# Altium PCB PCB1.PcbDoc
Units mm, origin at the board's own origin, x right, y up, seen from the top; angles counter-clockwise.
Board outline 64.18 x 56.7 mm, 2 copper layers (Top Layer, Bottom Layer); 29 components, 60 nets, 171 pads, 68 vias.
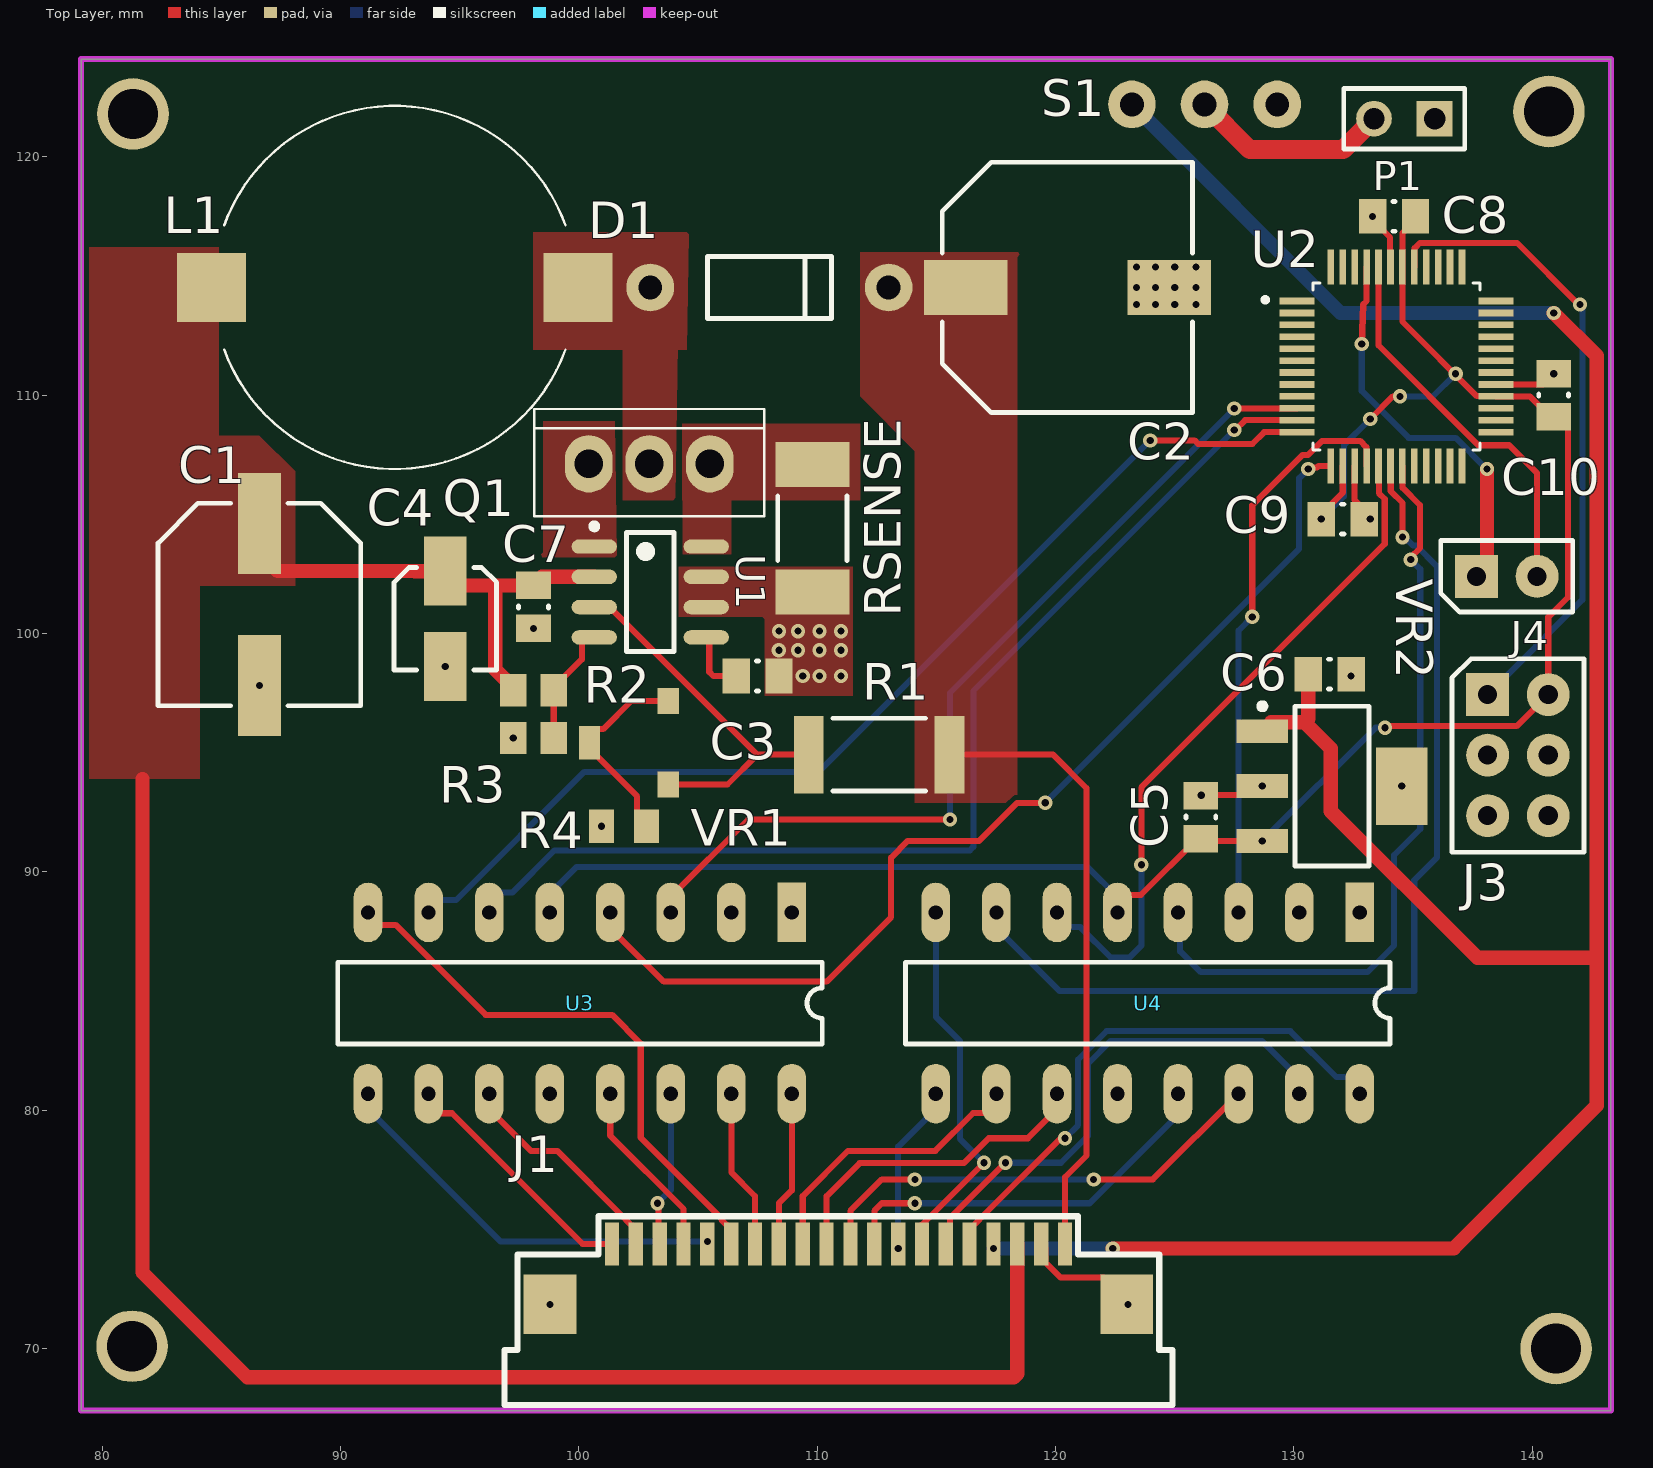
[diagram p0: Top Layer view]
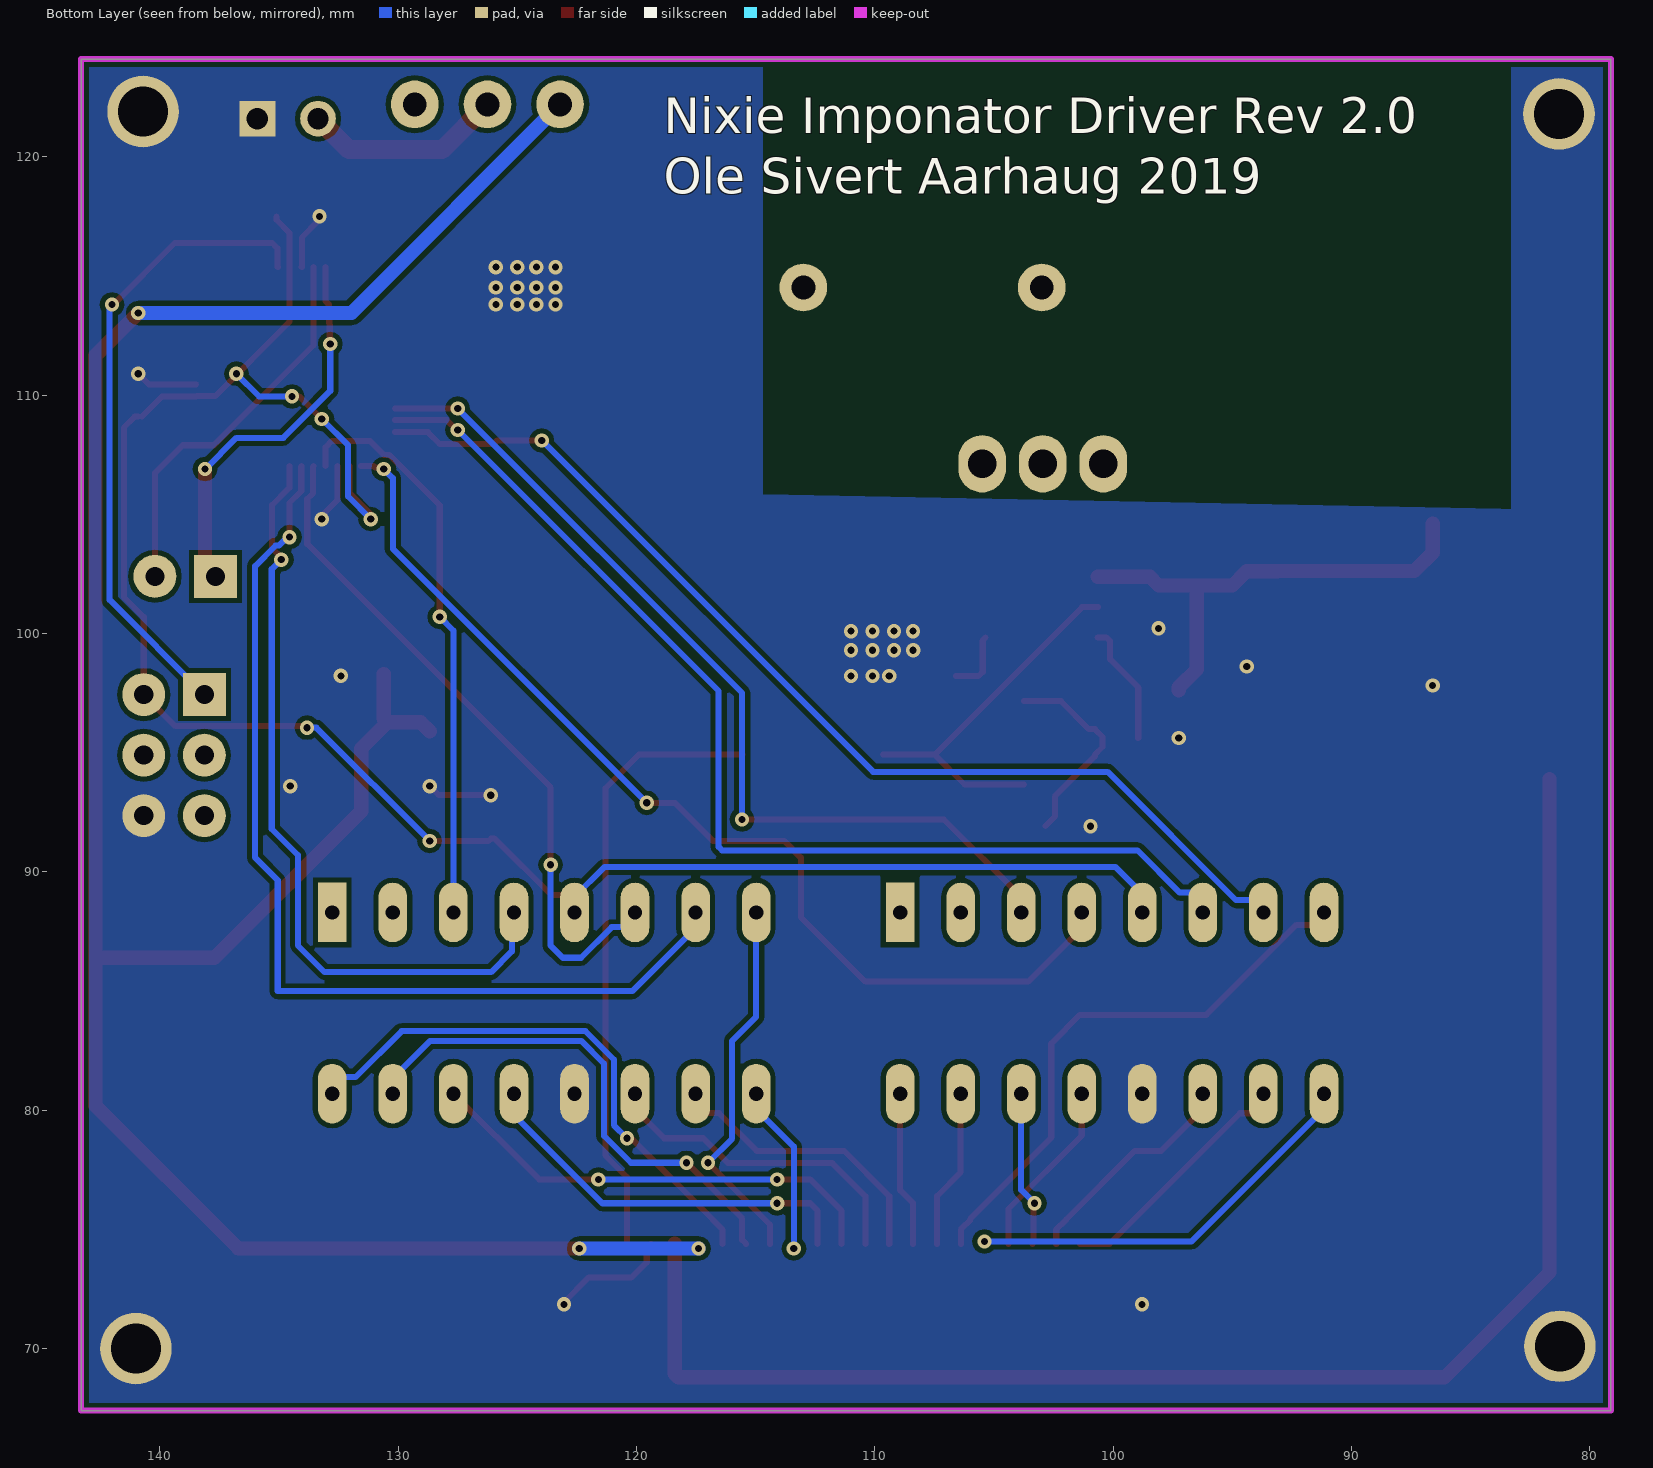
[diagram p1: Bottom Layer view, seen from below]

## Layer stack, top to bottom
Top Solder: solder mask 0.0102, Solder Resist, Dk 3.5
Top Layer: signal copper 0.0356
Dielectric 1: dielectric 0.32, FR-4, Dk 4.8
Bottom Layer: signal copper 0.0356
Bottom Solder: solder mask 0.0102, Solder Resist, Dk 3.5

## Board outline
79.121,67.4 79.121,124.1 143.3,124.1 143.3,67.4

## Design rules (kind name [scope] priority, off if disabled: settings)
BoardOutlineClearance [All] p1: gap=0.2 ignorepadtopadclearanceinfootprint=FALSE except(0.4: Arc-SplitBarrior Arc-SplitContinuation Track-SplitBarrior Track-SplitContinuation SMDPad-SplitBarrior SMDPad-SplitContinuation THPad-SplitBarrior THPad-SplitContinuation Via-SplitBarrior Via-SplitContinuation Fill-SplitBarrior Fill-SplitContinuation Poly-SplitBarrior Poly-SplitContinuation Region-SplitBarrior Region-SplitContinuation Text-SplitBarrior Text-SplitContinuation)
Clearance "Clearance Bottom Layer" [OnLayer('Bottom Layer')] p1: gap=0.203 ignorepadtopadclearanceinfootprint=TRUE except(0.254: Arc-Text Track-Text SMDPad-Text THPad-Text Via-Text Fill-Text Poly-Text Region-Text Text-Text)
Clearance "Clearance Top Layer" [OnLayer('Top Layer')] p2: gap=0.203 ignorepadtopadclearanceinfootprint=TRUE except(0.254: Arc-Text Track-Text SMDPad-Text THPad-Text Via-Text Fill-Text Poly-Text Region-Text Text-Text)
Clearance [All] p3: gap=0.2 ignorepadtopadclearanceinfootprint=FALSE except(0.089: Arc-Arc Arc-Track Arc-SMDPad Track-Track Track-SMDPad SMDPad-SMDPad; 0.127: Arc-Via Track-Via SMDPad-Via THPad-Via Via-Via; 0.254: Arc-Text Track-Text SMDPad-Text THPad-Text Via-Text Fill-Text Poly-Text Region-Text Text-Text)
HoleSize [All] p1: absolutevalues=TRUE maxlimit=6.3 minlimit=0.2 maxpercent=80.000 minpercent=20.000
MinimumAnnularRing [All] p1: minimumring=0.076
MinimumSolderMaskSliver [All] p1: minsoldermaskwidth=0.1
PlaneConnect [All] p1: planeconnectstyle=Direct reliefexpansion=0.508 reliefentries=4 reliefconductorwidth=0.254 reliefairgap=0.254
PolygonConnect PolygonConnect_1 [All] p1: connectstyle=Direct reliefconductorwidth=0.508 reliefentries=4 polygonreliefangle="90 Angle" airgapwidth=0.254
RoutingCorners [All] p1: cornerstyle=Round minsetback=2.54 maxsetback=2.54
RoutingVias [All] p1: holewidth=0.5 width=1 viastyle="Through Hole" minholewidth=0.2 minwidth=0.45 maxholewidth=1 maxwidth=2
SilkToSilkClearance [All] p1: silktosilkclearance=0.1
SilkToSolderMaskClearance [IsPad] p1: minsilkscreentomaskgap=0.1 clearancetoexposedcopper=TRUE
SolderMaskExpansion [All] p1: expansion=0.102
Width [All] p1: maxlimit=2.54 minlimit=0.089 preferedwidth=0.381
24 further rules are at their usual default settings.

## Classes and differential pairs
component class Controller: C8 C9 C10 U2
component class NixieDriver: "Binary Rotary Switch" C1 C2 C3 C4 C5 C6 C7 D1 J1 J3 J4 L1 P1 Q1 R1 R2 R3 R4 RSENSE S1 U1 U3 U4 VR1 VR2
net class HV: NetJ2_1 NixieVCC

## Components (designator, comment, footprint, x,y, rotation, side; value= is the part's Value field where it differs from the comment)
C1 "100 µF, 25 V" CAPAE9583X65M 86.6,101.219 r270 top
C2 "10 µF, 250 V" CAPAE112103X170M 120.5,114.519 r0 top
C3 "100nF" CAPC0805(2012)100_N 107.5,98.219 r180 top
C4 "10µF 16 V" CAPAE5542X55M 94.4,100.619 r270 top
C5 "1uF" CAPC0805(2012)100_N 126.1,92.3 r270 top
C6 "1uF" CAPC0805(2012)100_N 131.5,98.3 r180 top
C7 "100nF" CAPC0805(2012)100_N 98.1,101.119 r270 top
C8 "1uf" CAPC0805(2012)100_N 134.2,117.5 r0 top
C9 "1uf" CAPC0805(2012)100_N 132.05,104.8 r180 top
C10 "1uf" CAPC0805(2012)100_N 140.9,110 r270 top
D1 "BAV21" DO-41 108,114.519 r0 top
J1 "ZF1-20-01-XX-WT" ZF1-20-01-XX-WT 110.394,74.4 r0 top
J3 "UPDI" HDRV6W64P254_2X3_762X508X900B 139.4,94.9 r0 top
J4 "UartDebug" HDRV2W64P254_1X2_508X254X900B 140.2,102.4 r90 top
L1 "100 µH, 1.8 A" B82479A1 84.6,114.519 r0 top
P1 "9V Battery" HDR1X2 135.9,121.6 r180 top
Q1 "IRF644" TO-220-3P 102.96,107.119 r180 top
R1 "1.5M" RC2512 112.6,94.919 r0 top
R2 "10K" R0805 98.1,97.619 r180 top
R3 "10K" R0805 98.1,95.619 r0 top
R4 "10k" RESC0805(2012)_N 101.9,91.919 r0 top
RSENSE "0.05 ohm" LR2010 109.8,104.419 r90 top
S1 "Switch SPDT" 3TH 126.252,122.2 r180 top
U1 "MAX1771ESA" S8-5_L 103,101.744 r0 top
U2 "ATMEGA4809-AFR" *QFP50P900X900X120-48N 134.3,111.2 r0 top
U3 "K155IV1" CircuitWorks-DIP16 108.94,88.3 r270 top
U4 "K155IV1" CircuitWorks-DIP16 132.76,88.3 r270 top
VR1 "5k" "PVG3A trimpot" 102.1,95.419 r90 top
VR2 "MCP1703A" SOT230P700X180-4N 131.6,93.6 r0 top

## Footprints (in the part's own frame and the unit in brackets; to place one, negate y for a bottom-side part, rotate by r counter-clockwise, add the part's x,y. Pads: shape width x height; smd on the part's side, far side on the other; paste and mask are expansions set on the pad)
3TH [mm]
  round 2 hole 1: 1(-3.048,0) 2(0,0) 3(3.048,0)
*QFP50P900X900X120-48N [mm]
  rect 1.47x0.28 smd: 1(-4.17,2.75) 2(-4.17,2.25) 3(-4.17,1.75) 4(-4.17,1.25) 5(-4.17,0.75) 6(-4.17,0.25) 7(-4.17,-0.25) 8(-4.17,-0.75) 9(-4.17,-1.25) 10(-4.17,-1.75) 11(-4.17,-2.25) 12(-4.17,-2.75) 25(4.17,-2.75) 26(4.17,-2.25) 27(4.17,-1.75) 28(4.17,-1.25) 29(4.17,-0.75) 30(4.17,-0.25) 31(4.17,0.25) 32(4.17,0.75) 33(4.17,1.25) 34(4.17,1.75) 35(4.17,2.25) 36(4.17,2.75)
  rect 0.28x1.47 smd: 13(-2.75,-4.17) 14(-2.25,-4.17) 15(-1.75,-4.17) 16(-1.25,-4.17) 17(-0.75,-4.17) 18(-0.25,-4.17) 19(0.25,-4.17) 20(0.75,-4.17) 21(1.25,-4.17) 22(1.75,-4.17) 23(2.25,-4.17) 24(2.75,-4.17) 37(2.75,4.17) 38(2.25,4.17) 39(1.75,4.17) 40(1.25,4.17) 41(0.75,4.17) 42(0.25,4.17) 43(-0.25,4.17) 44(-0.75,4.17) 45(-1.25,4.17) 46(-1.75,4.17) 47(-2.25,4.17) 48(-2.75,4.17)
  silkscreen extent -5.6,-3.5 3.5,3.5
B82479A1 [mm] "Inductor"
  rect 2.9x2.9 smd: 1(0,0) 2(15.37,0)
  silkscreen extent 0.52,-7.62 14.84,7.62
CAPAE5542X55M [mm] "Aluminum Electrolytic Capacitor, Body 4,20x4,20x5,50mm, IPC Low Density"
  rect 2.9x1.8 smd: 1(-2,0) 2(2,0)
  silkscreen extent -2.15,-2.15 2.15,2.15, body extent -2.75,-2.15 2.75,2.15, height 5.5
CAPAE9583X65M [mm] "Aluminum Electrolytic Capacitor, Body 8,30x8,30x6,50mm, IPC Low Density"
  rect 4.25x1.8 smd: 1(-3.4,0) 2(3.4,0)
  silkscreen extent -4.25,-4.25 4.25,4.25, body extent -4.75,-4.25 4.75,4.25, height 6.5
CAPAE112103X170M [mm] "Aluminum Electrolytic Capacitor, Body 10,30x10,30x17,00mm, IPC Low Density"
  rect 3.5x2.3 smd: 1(-4.275,0) 2(4.275,0)
  silkscreen extent -5.25,-5.25 5.25,5.25, body extent -5.63,-5.25 5.62,5.25, height 17
CAPC0805(2012)100_N [mm] "Chip Capacitor, Body 2.0x1.2mm, Height 1.0mm, IPC Medium Density"
  rect 1.15x1.45 smd: 1(-0.9,0) 2(0.9,0)
  silkscreen extent -0.05,-0.63 0.05,0.63, body extent -1.1,-0.72 1.1,0.73, height 1
CircuitWorks-DIP16 [mm]
  rect 2.5x1.2 hole 0.6: 1(0,0)
  oval 2.5x1.2 hole 0.6: 2(0,-2.54) 3(0,-5.08) 4(0,-7.62) 5(0,-10.16) 6(0,-12.7) 7(0,-15.24) 8(0,-17.78) 9(7.6,-17.78) 10(7.6,-15.24) 11(7.6,-12.7) 12(7.6,-10.16) 13(7.6,-7.62) 14(7.6,-5.08) 15(7.6,-2.54) 16(7.6,0)
  silkscreen extent 2.08,-19.05 5.51,1.27, body extent -0.13,-19.68 7.75,1.91, height 4.19
DO-41 [mm]
  round 2 hole 1: 1(-5,0) 2(5,0)
  silkscreen extent -2.6,-1.3 2.6,1.3, body extent -5.51,-1.36 5.51,1.36, height 3.22
HDR1X2 [mm] "Connector; Header; 2 Position"
  rect 1.5x1.5 hole 0.9: 1(0,0)
  round 1.5 hole 0.9: 2(2.54,0)
  silkscreen extent -1.27,-1.27 3.81,1.27
HDRV2W64P254_1X2_508X254X900B [mm] "Header 1x2"
  rect 1.8x1.8 hole 0.8: 1(0,2.54)
  round 1.8 hole 0.8: 2(0,0)
  silkscreen extent -1.5,-1.5 1.5,4.04
HDRV6W64P254_2X3_762X508X900B [mm] "Header 2x3"
  rect 1.8x1.8 hole 0.8: 1(-1.27,2.54)
  round 1.8 hole 0.8: 2(1.27,2.54) 3(-1.27,0) 4(1.27,0) 5(-1.27,-2.54) 6(1.27,-2.54)
  silkscreen extent -2.77,-4.07 2.77,4.04, body extent -2.54,-3.81 2.54,3.81, height 8.45
LR2010 [mm] "Chip Resistor, 2-Leads, Body 6,50x3,05mm, IPC Medium Density"
  rect 1.9x3.1 smd: 1(-2.675,0) 2(2.675,0)
  silkscreen extent -1.35,-1.45 1.35,1.45, body extent -3.25,-1.53 3.25,1.52, height 0.84
"PVG3A trimpot" [mm]
  rect 1.1x0.9 smd: 1(1.75,-1.65) 3(-1.75,-1.65)
  rect 1.4x0.9 smd: 2(0,1.65)
R0805 [mm]
  rect 1.1x1.35 smd: 1(-0.85,0) 2(0.85,0)
  body extent -1,-0.64 1,0.64, height 0.65
RC2512 [mm]
  rect 1.25x3.25 smd: 1(-2.95,0) 2(2.95,0)
  silkscreen extent -1.95,-1.53 1.95,1.52, body extent -3.22,-1.62 3.23,1.63, height 0.65
RESC0805(2012)_N [mm] "Chip Resistor, Body 2.0x1.3mm, IPC Medium Density"
  rect 1.05x1.4 smd: 1(-0.95,0) 2(0.95,0)
  body extent -1.15,-0.68 1.15,0.68, height 0.76
S8-5_L [mm] "SOIC, 8-Leads, Body 4.9x3.9mm, Pitch 1.27mm, IPC High Density"
  oval 1.9x0.6 smd: 1(-2.35,1.905) 2(-2.35,0.635) 3(-2.35,-0.635) 4(-2.35,-1.905) 5(2.35,-1.905) 6(2.35,-0.635) 7(2.35,0.635) 8(2.35,1.905)
  silkscreen extent -2.47,-2.5 1,2.88, body extent -2,-2.5 2,2.5, height 1.75
SOT230P700X180-4N [mm] "SOT223, 4-Leads, Body 6,50x7,00mm (avg), Pitch 2,30mm, IPC Medium Density"
  rect 2.15x1 smd: 1(-2.925,2.3) 2(-2.925,0) 3(-2.925,-2.3)
  rect 2.15x3.25 smd: 4(2.925,0)
  silkscreen extent -3.05,-3.35 1.55,3.47, body extent -3.5,-3.35 3.5,3.35, height 1.8
TO-220-3P [mm]
  oval 2x2.4 hole 1.2: 1(2.54,0) 2(0,0) 3(-2.54,0)
  silkscreen extent -4.83,-2.3 4.83,2.2, body extent -4.83,-2.3 4.83,2.2, height 19.3
ZF1-20-01-XX-WT [mil]
  rect 23.6x71 smd mask+2: 1(-354.46,0) 2(-315.06,0) 3(-275.66,0) 4(-236.26,0) 5(-196.86,0) 6(-157.48,0) 7(-118.08,0) 8(-78.68,0) 9(-39.28,0) 10(0.12,0) 11(39.51,0) 12(78.91,0) 13(118.31,0) 14(157.71,0) 15(197.11,0) 16(236.24,0) 17(275.64,0) 18(315.04,0) 19(354.44,0) 20(393.84,0)
  rect 87x98 smd mask+2: G1(-456.66,-100) G2(496.04,-100)
  silkscreen extent -532,-266 572,46, body extent -508,-248 555,122, height 258

## Part data
C1: library part EEEFK1E101P, ComponentLink1Description=farnell, ComponentLink1URL=https://no.farnell.com/panasonic/eeefk1e101p/cap-100-f-25v-radial-smd/dp/9695770
C2: library part EEVEB2E100Q, ComponentLink1Description=Farnell, ComponentLink1URL=https://no.farnell.com/panasonic/eeveb2e100q/cap-10-f-250v-radial-smd/dp/2326345?st=eeveb2e100q, ComponentLink2Description=Datasheet, ComponentLink2URL=http://www.farnell.com/datasheets/2245254.pdf
C3 C7 C8 C9 C10: library part 2445, "X7R 50V", antall=50, dybde=4, hylle=6, id=2445, kolonne=3, lager_type=Fremlager, leverandor=Farnell, leverandor_varenr=2408556, navn=100nF, nokkelord="Kondensator, capacitor", pakke_opprettet="14.11.2014 20:52:01", pakke_opprettet_av=815, pakketype=0805, pris=1, produsent=Multikomp, rad=1, rom=OV, symbol_opprettet="14.11.2014 20:19:34", symbol_opprettet_av=815
C4: library part EEEFC1C100R, ComponentLink1Description=farnell, ComponentLink1URL=https://no.farnell.com/panasonic/eeefc1c100r/cap-10-f-16v-radial-smd/dp/9693491
C5 C6: library part 3582, "X7R 50V 10%", id=3582, leverandor=Farnell, leverandor_varenr=1735541, navn=1uF, nokkelord="Kondensator, capacitor", pakke_opprettet="14.11.2014 20:52:01", pakke_opprettet_av=815, pakketype=0805, pris=4, produsent=Murata, symbol_opprettet="14.11.2014 20:19:34", symbol_opprettet_av=815
D1: library part 1290
J1: "ZERO INSERTION FORCE 1mm ASSEMBLY, BOTTOM CONTACT."
J3: library part 3187, beskrivelse="2,54mm pitch", id=3187, navn="Header 2x3", pakke_opprettet="23.07.2015 20:17:54", pakke_opprettet_av=815, pakketype=TH, pris=3, symbol_opprettet="13.11.2014 11:03:43", symbol_opprettet_av=815
J4: library part 2429, beskrivelse="2,54mm pitch", id=2429, navn="Header 1x2", pakke_opprettet="13.11.2014 12:30:48", pakke_opprettet_av=815, pakketype=TH, pris=1, symbol_opprettet="13.11.2014 10:58:53", symbol_opprettet_av=815
L1: library part B82479A1104M
P1: library part "Header 2", "Header, 2-Pin", LatestRevisionDate=17-Jul-2002, LatestRevisionNote="Re-released for DXP Platform.", Publisher="Altium Limited"
Q1: library part 4730, "Power MOSFET", ComponentLink1Description=farnell, ComponentLink1URL=https://no.farnell.com/vishay/irf644pbf/mosfet-n-250v-14a-to-220/dp/8648409?scope=partnumberlookahead&ost=IRF644PBF&searchref=searchlookahead&exaMfpn=true&ddkey=https%3Ano-NO%2FElement14_Norway%2Fw%2Fsearch, id=4730, navn=IRF644, nokkelord="power mosfet, transistor", pakke_opprettet="09.06.2015 21:08:41", pakke_opprettet_av=815, pakketype=TO-220, pris=0, produsent=Vishay, symbol_opprettet="14.09.2016 15:31:38", symbol_opprettet_av=815
R1 R2 R3 RSENSE: library part Resistor, ComponentLink1Description=farnell
  R1: ComponentLink1URL=https://no.farnell.com/yageo/rc2512jk-071m5l/res-1m5-5-1w-2512-thick-film/dp/9236058?rpsku=rel3:3258142&isexcsku=false#
  R2 R3 RSENSE: ComponentLink1URL=https://no.farnell.com/tt-electronics-welwyn/lr2010-r05fw/res-0r05-1-1w-2010-thick-film/dp/1100050
R4: library part 3584, "0.1W 1% Thick film resistor", id=3584, leverandor=Farnell, navn=1k, nokkelord="Resistor Motstand", pakke_opprettet="27.01.2016 14:23:16", pakke_opprettet_av=815, pakketype=0805, pris=0, produsent=Multikomp, symbol_opprettet="08.07.2014 21:16:33", symbol_opprettet_av=815
U1: library part CMP-0246-00656-1, "12 V or Adjustable Output, High-Efficiency, Low IQ, Step-Up DC-DC Controller, -40 to 85 degC, 8-Pin SOIC (S8-5), RoHS", Manufacturer=Maxim, Reference Voltage="1.5 V", Shutdown Current="5 uA Max.", Supply Current="110 uA Max.", Temperature Range="-40 to 85 degC", ComponentLink1Description="Manufacturer URL", ComponentLink1URL=http://www.maximintegrated.com/, ComponentLink2Description=Datasheet, ComponentLink2URL=http://datasheets.maximintegrated.com/en/ds/MAX1771.pdf, ComponentLink3Description="Package Specification", ComponentLink3URL=http://pdfserv.maximintegrated.com/package_dwgs/21-0041.PDF, DatasheetVersion="Rev. 2", Mounting Technology="Surface Mount", PackageDescription="8-Pin Small Outline Integrated Circuit Package, Body 4.9 x 3.9 mm, Pitch 1.27 mm", PackageReference=S8-5, PackageVersion="Rev. E", PartNumber=MAX1771ESA, Preset Vout="12 V", RoHS=TRUE, VIN="3 to 16.5 V"
U2: "20MHz 48KB TQFP48 Ind 125C Green T&R", Package="TQFP-48 Microchip", Availability=Unavailable, MF=Microchip, MP=ATMEGA4809-AFR, Price=None, SnapEDA_Link=https://www.snapeda.com/parts/ATMEGA4809-AFR/Microchip/view-part/?ref=snap
U3 U4: library part 1463, beskrivelse="Nixie tube driver (K155NB1)", id=1463, navn=K155IV1, pakke_opprettet="25.08.2016 00:00:22", pakke_opprettet_av=1607, pakketype=TH, pris=5, symbol_opprettet="10.10.2018 20:11:59", symbol_opprettet_av=2099
VR1: library part PVG3A502C01R00, ComponentLink1Description=farnell, ComponentLink1URL=https://no.farnell.com/bourns/pvg3a502c01r00/trimmer-pot-5k-1turn-smd/dp/2709479
VR2: ComponentLink1Description=datasheet, ComponentLink1URL=http://ww1.microchip.com/downloads/en/DeviceDoc/20005122B.pdf, ComponentLink2Description=farnell, ComponentLink2URL=https://no.farnell.com/microchip/mcp1703a-5002e-db/ldo-16vin-0-25a-5v-2-3sot223/dp/2113889?st=MCP1703A

## Free pads (board coordinates)
  round 3 hole 2.1: M2(81.26,70.103) M2(81.3,121.8) M2(140.7,121.9) M2(141,70)

## Via types
v1: diameter 0.6, hole 0.3, Top Layer to Bottom Layer, tented both sides, 68 vias

## Nets (pads, with @x,y where several pads share a name; then routed paths per layer and width w, separated by ;. In a path a pad name is that pad's centre, name@x,y a point inside that pad or via, vN(x,y) a via of type N, cw(c..) or ccw(c..) an arc to the next point about the centre after c; other vN are vias at no path point)
"5V VCC": C5.2 C8.2 C9.2 C10.2 J3.2 U2.14 U2.28 U2.42 U3.5 U4.5 VR2.3 | length 85.2
  Top Layer w0.254: U4.5 122.6,88.594 123.037,89.031 123.581,89.031 125.95,91.4 C5.2 126.2,91.3 v1(128.675,91.3) ; v1(131.15,104.8) 131.15,105.014 132.05,105.914 U2.14 ; v1(133.2,109) 134.15,109.95 v1(134.45,109.95) ; v1@133.819,96.113 139.343,96.113 J3.2 140.67,100.691 141.498,101.519 141.498,108.652 141.05,109.1 C10.2 ; C8.2 135.1,117.35 134.55,116.8 U2.42 134.55,113.089 137.676,109.963 138.457,109.963 U2.28 139.9,109.95 C10.2@140.75,109.1
  Bottom Layer w0.254: U3.5 98.78,89.08 99.9,90.2 121.35,90.2 122.6,88.95 U4.5 ; v1(128.675,91.3) 133.425,96.05 v1(133.819,96.05) ; v1(131.15,104.8) 132.1,105.75 132.1,107.9 v1(133.2,109) ; v1(134.45,109.95) 135.834,109.95 v1(136.784,110.9)
/PSUActive: R2.1 R3.2 U1.4 | length 5.1
  Top Layer w0.254: R3.2 R2.1 98.95,97.744 100.127,98.921 100.127,99.679 100.287,99.839 U1.4
BatConnInn: C6.2 J1.17 S1.3 VR2.1 | length 105
  Top Layer w0.6: v1(122.4,74.2) 136.7,74.2 142.7,80.2 142.7,86.4 ; VR2.1 129.048,96.273 130.451,96.273 ; C6.2 130.6,96.422 130.451,96.273 ; v1(140.9,113.45) 142.7,111.65 142.7,86.4 ; 130.451,96.273 131.55,95.174 131.55,92.55 137.7,86.4 142.7,86.4
  Bottom Layer w0.6: v1(117.395,74.2) v1(122.4,74.2) ; S1.3 131.954,113.45 v1(140.9,113.45)
BatConnOut: C1.1 C4.1 C7.1 J1.18 L1.1 R2.2 U1.2 | length 85.5
  Top Layer w0.6: 81.7,93.9 81.7,73.2 86.105,68.795 118.247,68.795 118.395,68.944 J1.18 ; C1.1 86.6,103.394 87.373,102.621 93.117,102.621 93.119,102.619 C4.1 95,102.019 96.55,102.019 ; R2.2 97.25,97.744 96.5,98.494 96.5,101.969 96.55,102.019 ; U1.2 98.46,102.379 C7.1 96.55,102.019
GND: C1.2 C2.2 C3.1 C4.2 C5.1 C6.1 C7.2 C8.1 C9.1 C10.1 J1.19 J1.G1 J1.G2 J3.6 P1.1 pad.M2 R3.1 R4.1 RSENSE.1 U1.6 U1.7 U2.15 U2.29 U2.43 U3.12 U4.12 VR2.2 VR2.4 | length 15.5
  Top Layer w0.254: J1.19 119.569,74.227 119.569,73.621 120.212,72.978 122.015,72.978 122.993,72 J1.G2 ; C5.1 126.127,93.227 128.302,93.227 v1(128.675,93.6) ; C6.1@132.4,98.15 C6.1 ; U2.15 132.55,105.6 133.2,104.95 v1(133.2,104.8) ; v1(133.3,117.5) 133.3,117.35 134.037,116.613 134.037,115.383 U2.43 ; U2.29 138.472,110.452 140.452,110.452 v1(140.9,110.9)
  other v1: 98.794,71.86 123.037,71.86 100.95,91.919 126.113,93.213 134.525,93.6 97.25,95.619 86.6,97.819 109.396,98.219 110.1,98.219 111,98.219 132.4,98.225 94.4,98.619 108.395,99.3 109.2,99.3 110.1,99.3 111,99.3 108.4,100.1 109.2,100.1 110.1,100.1 111,100.1 98.1,100.219 123.4,113.8 124.2,113.8 125,113.8 125.9,113.8 123.4,114.519 124.2,114.519 125,114.519 125.9,114.519 123.4,115.37 124.2,115.37 125,115.37 125.9,115.37
NetC3_2: C3.2 U1.5 | length 2.7
  Top Layer w0.254: U1.5 105.474,99.715 105.474,98.389 105.644,98.219 C3.2
NetD1_1: D1.1 L1.2 Q1.2
NetJ1_1: J1.1 U3.10 | length 10.5
  Top Layer w0.254: U3.10 93.7,80.314 94.137,79.877 94.681,79.877 100.158,74.4 J1.1
NetJ1_2: J1.2 U3.11 | length 9.5
  Top Layer w0.254: U3.11 96.24,80.05 97.99,78.3 99.097,78.3 101.977,75.421 101.977,75.416 102.391,75.002 J1.2
NetJ1_3: J1.3 U3.14 | length 6.6
  Top Layer w0.254: v1(103.3,76.1) 103.346,76.054 103.346,74.446 J1.3
  Bottom Layer w0.254: v1(103.3,76.1) 103.86,76.66 U3.14
NetJ1_4: J1.4 U3.13 | length 7.6
  Top Layer w0.254: U3.13 101.32,78.934 104.392,75.862 J1.4
NetJ1_5: J1.5 U3.9 | length 17.2
  Bottom Layer w0.254: U3.9 91.16,80.05 96.71,74.5 v1(105.4,74.5)
NetJ1_6: J1.6 U3.8 | length 23.7
  Top Layer w0.254: U3.8 91.16,88.214 91.597,87.777 92.319,87.777 96.096,84 101.4,84 102.6,82.8 102.6,78.85 105.98,75.47 105.98,75.416 106.394,75.002 J1.6
NetJ1_7: J1.7 U3.15 | length 6.7
  Top Layer w0.254: U3.15 106.4,77.394 107.394,76.4 J1.7
NetJ1_8: J1.8 U3.16 | length 6.5
  Top Layer w0.254: J1.8 108.395,76.1 108.94,76.645 U3.16
NetJ1_9: J1.9 U4.10 | length 12.8
  Top Layer w0.254: J1.9 109.396,76.4 111.296,78.3 114.957,78.3 116.539,79.882 117.083,79.882 117.52,80.319 U4.10
  Bottom Layer w0.254: U4.10@117.52,80.05 U4.10
NetJ1_10: J1.10 U4.11 | length 13.8
  Top Layer w0.254: J1.10 110.397,76.4 111.783,77.787 116.157,77.787 117.198,78.828 118.838,78.828 120.06,80.05 U4.11
NetJ1_11: J1.11 U4.14 | length 19.7
  Top Layer w0.254: J1.11 111.397,75.781 112.716,77.1 v1(114.1,77.1) ; v1(121.6,77.1) 124.08,77.1 U4.14
  Bottom Layer w0.254: v1(114.1,77.1) v1(121.6,77.1)
NetJ1_12: J1.12 U4.13 | length 16.7
  Top Layer w0.254: J1.12 112.398,75.781 112.717,76.1 v1(114.1,76.1)
  Bottom Layer w0.254: v1(114.1,76.1) 121.43,76.1 125.14,79.81 U4.13
NetJ1_13: J1.13 U4.9 | length 7.2
  Bottom Layer w0.254: v1(113.4,74.2) 113.4,78.47 114.91,79.98 114.98,79.98 U4.9
NetJ1_14: J1.14 U4.8 | length 15.8
  Top Layer w0.254: J1.14 114.399,75.199 v1(117,77.8)
  Bottom Layer w0.254: U4.8 114.98,83.92 115.99,82.91 115.99,78.81 v1(117,77.8)
NetJ1_15: J1.15 U4.15 | length 21.9
  Top Layer w0.254: J1.15 115.57,74.57 115.57,75.47 v1(117.9,77.8)
  Bottom Layer w0.254: v1(117.9,77.8) 120.23,77.8 121.361,78.931 121.361,81.961 122.31,82.91 128.66,82.91 130.22,81.35 U4.15
NetJ1_16: J1.16 U4.16 | length 23.3
  Top Layer w0.254: J1.16 116.394,75.002 116.808,75.416 116.808,75.421 120.215,78.828 v1(120.397,78.828)
  Bottom Layer w0.254: v1(120.397,78.828) 120.947,79.378 120.947,82.132 122.139,83.324 129.853,83.324 131.779,81.398 132.323,81.398 132.76,80.961 U4.16
NetJ2_1: 
NetJ2_3: 
NetJ2_5: 
NetJ2_6: 
NetJ2_7: 
NetJ2_8: 
NetJ2_9: 
NetJ2_10: 
NetJ2_11: 
NetJ2_12: 
NetJ2_13: 
NetJ2_14: 
NetJ2_15: 
NetJ2_16: 
NetJ2_17: 
NetJ2_18: 
NetJ2_19: 
NetJ2_20: 
NetJ3_1: J3.1 U2.41 | length 26.9
  Top Layer w0.254: U2.41 135.063,115.383 135.063,116.164 135.291,116.392 139.358,116.392 v1@141.975,113.775
  Bottom Layer w0.254: J3.1 142.1,101.41 142.1,113.7 v1(142,113.8)
NetJ4_1: J4.1 U2.45 | length 16.5
  Top Layer w0.254: v1(132.847,112.15) 132.91,113.81 133.05,113.95 U2.45
  Top Layer w0.6: J4.1 138.097,102.837 v1(138.097,106.9)
  Bottom Layer w0.254: v1(132.847,112.15) 132.847,110.183 134.818,108.212 136.784,108.212 v1(138.097,106.9)
NetJ4_2: J4.2 U2.44 | length 16.5
  Top Layer w0.254: U2.44 133.55,112.089 137.739,107.9 139.03,107.9 140.2,106.73 J4.2
NetN1_A: 
NetN2_A: 
NetP1_2: P1.2 S1.2 | length 8.4
  Top Layer w0.8: S1.2 128.152,120.3 132.06,120.3 P1.2
NetQ1_1: Q1.1 U1.1
NetQ1_3: Q1.3 RSENSE.2 U1.8
NetR1_1: R1.1 U1.3 VR1.3 | length 15.8
  Top Layer w0.254: U1.3 101.3,101.109 107.49,94.919 ; VR1.3 106.24,93.669 107.49,94.919 ; R1.1 107.49,94.919
NetR4_2: R4.2 VR1.1 VR1.2 | length 8.7
  Top Layer w0.254: R4.2 102.452,92.317 102.452,93.167 100.773,94.846 100.773,94.919 100.45,95.242 VR1.2 100.45,95.669 100.773,95.992 101.023,95.992 102.2,97.169 VR1.1
NetU2_10: U2.10 U3.3 | length 38.5
  Top Layer w0.254: U3.3 103.86,88.95 107.11,92.2 v1(115.57,92.2) ; v1(127.5,109.437) 130.117,109.437 U2.10
  Bottom Layer w0.254: v1(115.57,92.2) 115.57,97.507 v1(127.5,109.437)
NetU2_11: U2.11 U3.6 | length 46.5
  Top Layer w0.254: v1(127.5,108.54) 127.543,108.54 127.953,108.95 U2.11
  Bottom Layer w0.254: U3.6 96.24,88.694 96.677,89.131 97.211,89.131 98.98,90.9 116.401,90.9 116.55,91.049 116.55,97.59 v1(127.5,108.54)
NetU2_12: U2.12 U3.7 | length 44.9
  Top Layer w0.254: v1(123.975,108.1) 125.832,108.1 125.979,107.953 128.253,107.953 128.75,108.45 U2.12
  Bottom Layer w0.254: U3.7 93.7,88.386 94.137,88.823 94.859,88.823 100.236,94.2 110.075,94.2 v1(123.975,108.1)
NetU2_13: U2.13 U3.4 | length 44
  Top Layer w0.254: U3.4 101.32,87.644 101.326,87.644 103.57,85.4 110.397,85.4 113.1,88.103 113.1,90.6 113.8,91.3 116.795,91.3 118.395,92.9 v1(119.569,92.9) ; v1(130.6,106.9) 130.666,106.966 130.965,106.966 131.029,107.03 U2.13
  Bottom Layer w0.254: v1(119.569,92.9) 130.22,103.551 130.22,106.52 v1(130.6,106.9)
NetU2_16: U2.16 U4.3 | length 24.1
  Top Layer w0.254: v1(128.253,100.7) 128.253,105.383 130.357,107.487 130.587,107.487 131.184,108.084 132.776,108.084 133.037,107.824 133.037,107.043 U2.16
  Bottom Layer w0.254: U4.3 127.68,100.127 v1(128.253,100.7)
NetU2_17: U2.17 U4.6 | length 29.1
  Top Layer w0.254: v1(123.6,90.3) 123.6,93.55 133.812,103.762 133.812,105.644 133.563,105.893 133.563,107.017 U2.17
  Bottom Layer w0.254: U4.6 120.06,88.123 120.497,87.686 121.041,87.686 122.327,86.4 123.088,86.4 123.6,86.912 v1(123.6,90.3)
NetU2_18: U2.18 U4.7 | length 42.6
  Top Layer w0.254: U2.18 134.063,107.017 134.063,105.978 134.556,105.485 v1(134.556,104.044)
  Bottom Layer w0.254: U4.7 117.52,87.65 120.17,85 135.05,85 135.05,89.65 136,90.6 136,102.83 135.143,103.687 135.007,103.687 134.65,104.044 v1(134.556,104.044)
NetU2_19: U2.19 U4.4 | length 32.7
  Top Layer w0.254: U2.19 134.563,107.017 134.563,106.111 135.291,105.383 135.291,103.584 134.9,103.194 v1(134.9,103.1)
  Bottom Layer w0.254: U4.4 125.231,88.209 125.231,86.669 126.1,85.8 133.088,85.8 134.2,86.912 134.2,90.7 135.3,91.8 135.3,102.7 v1(134.9,103.1)
NixieVCC: C2.1 D1.2 J1.20 R1.2 | length 25.8
  Top Layer w0.254: R1.2 119.896,94.919 121.3,93.515 121.3,78.1 120.397,77.197 J1.20
pads on no net: J3.3 J3.4 J3.5 S1.1 U2.1 U2.2 U2.3 U2.4 U2.5 U2.6 U2.7 U2.8 U2.9 U2.20 U2.21 U2.22 U2.23 U2.24 U2.25 U2.26 U2.27 U2.30 U2.31 U2.32 U2.33 U2.34 U2.35 U2.36 U2.37 U2.38 U2.39 U2.40 U2.46 U2.47 U2.48 U3.1 U3.2 U4.1 U4.2

## Polygon pours and split planes (outlines as drawn)
NetQ1_3 on Top Layer "NETQ1_3_L01_P016" (solid, pour order 16): 106.4,103.317 104.364,103.317 104.364,105.727 106.4,105.727
BatConnOut on Top Layer "BATCONNOUT_L01_P014" (solid, pour order 14): 79.3,116.2 84.9,116.2 84.9,108.3 86.6,108.3 88.1,106.8 88.1,102 84.119,102 84.1,102.019 84.1,93.9 79.3,93.9 79.3,94
NixieVCC on Top Layer "NIXIEVCC_L01_P012" (solid, pour order 12): 118.6,116 118.395,115.795 118.395,92.9 114.1,92.9 114.1,107.65 111.8,109.95 111.8,116
GND on Top Layer "GND_L01_P010" (solid, pour order 10): 104.2,100.7 107.7,100.7 107.8,100.6 107.8,97.4 111.5,97.4 111.5,102.8 104.2,102.8
NetQ1_3 on Top Layer "NETQ1_3_L01_P008" (solid, pour order 8): 111.8,105.6 104.35,105.6 104.35,108.8 111.8,108.8
NetD1_1 on Top Layer "NETD1_1_L01_P006" (solid, pour order 6): 104.055,105.7 103.955,105.6 101.855,105.6 101.855,112.25 104.155,112.25
NetQ1_1 on Top Layer "NETQ1_1_L01_P004" (solid, pour order 4): 101.604,103.2 98.3,103.2 98.5,103.4 98.5,108.9 101.5,108.9
NetD1_1 on Top Layer "NETD1_1_L01_P002" (solid, pour order 2): 98.1,116.84 104.612,116.84 104.527,111.9 98.1,111.9
GND on Bottom Layer "GND_L02_P018" (solid, pour order 18): 79.121,104.619 79.121,105.152 114.7,105.852 114.7,124.1 143.3,124.1 143.3,67.4 79.121,67.4
GND on Bottom Layer "GND_L02_P020" (solid, pour order 20): 79.121,124.1 79.221,124.2 83.3,124.2 83.3,104.1 83.1,103.9 79.169,103.9 79.169,124.052

## Keep-outs
Keep-Out Layer:
  lines w0.254: 79.121,67.4 143.3,67.4 143.3,81.95 143.3,110.05 143.3,124.1 79.121,124.1 79.121,116.84 79.121,80.518 79.121,67.4

## Silkscreen, mask and mechanical layers (free items; w line width, h text height)
Bottom Overlay:
  text "Nixie Imponator Driver Rev 2.0 / Ole Sivert Aarhaug 2019" at 118.855,117.94 h2.54